# Altium PCB WCH_hairDrierCore_V1.5.PcbDoc (part 4 of 7)
Units mil, origin at the board's own origin, x right, y up, seen from the top; angles counter-clockwise.
Board outline 1683.54 x 992.13 mil, 4 copper layers (Top Layer, Mid-Layer 1, Mid-Layer 2, Bottom Layer); 84 components, 65 nets, 249 pads, 160 vias.
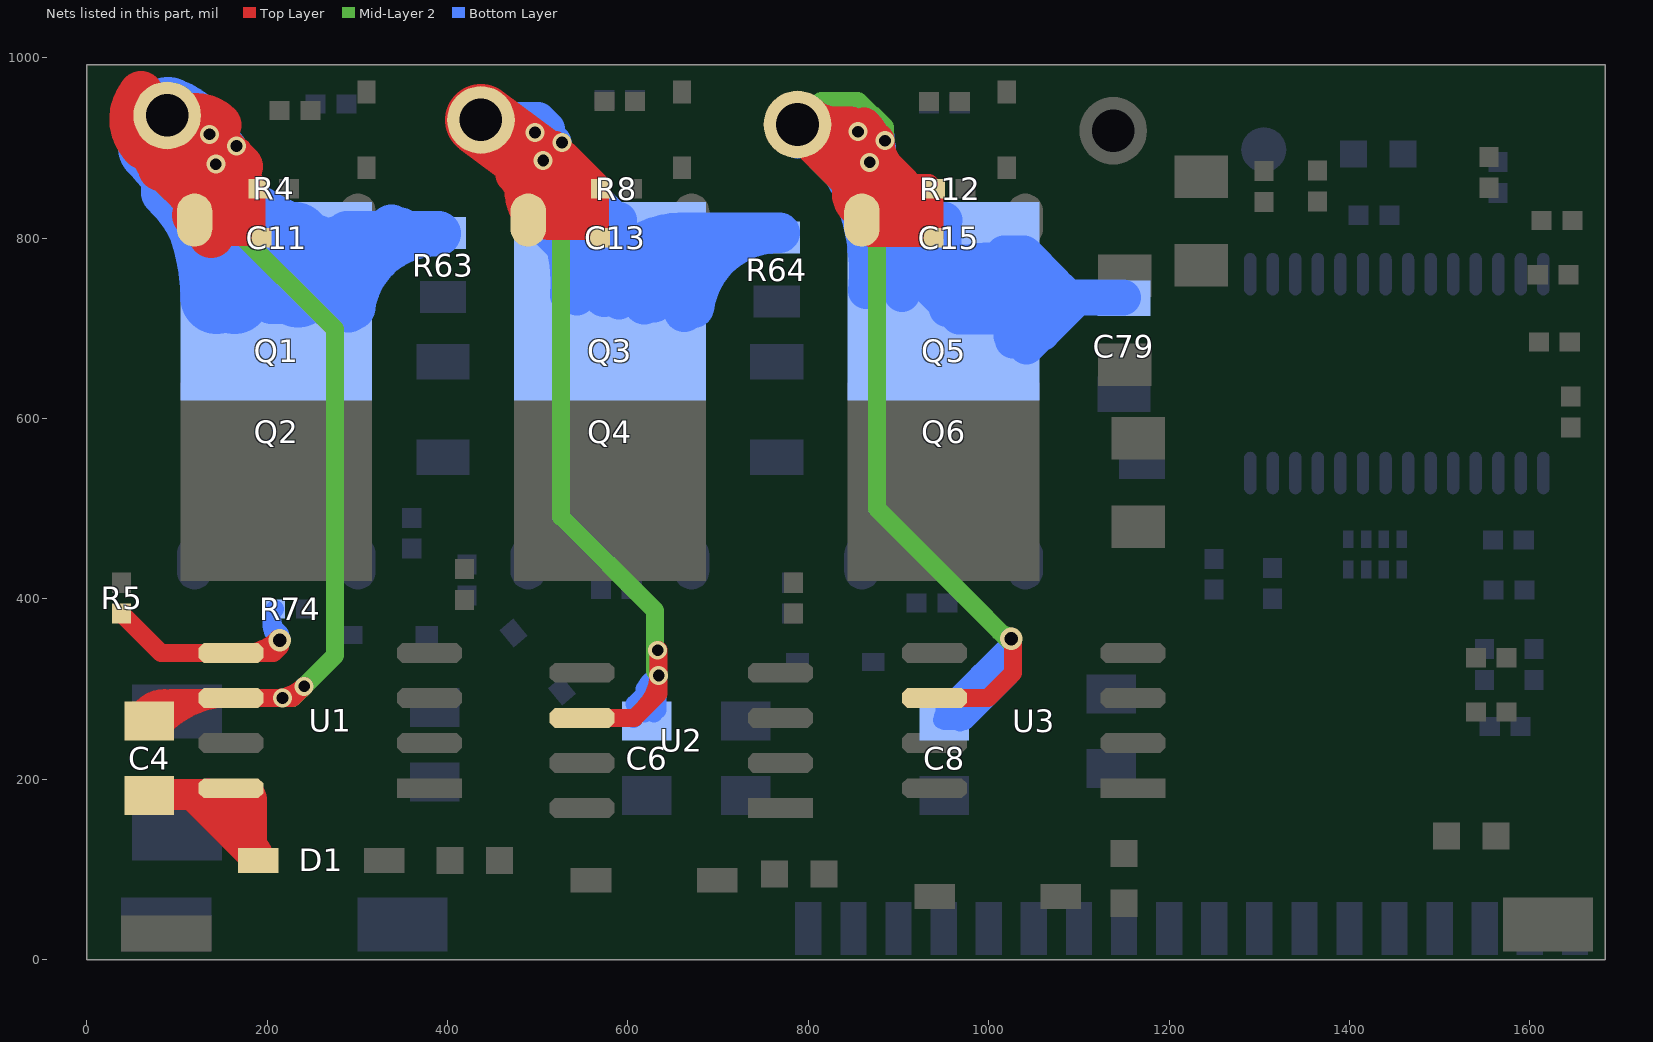
[diagram p6: the nets of this part, all layers, seen from the top]

## Via types
v1: diameter 21, hole 13, Top Layer to Bottom Layer, tented both sides, 155 vias
v2: diameter 25, hole 15, Top Layer to Bottom Layer, tented both sides, 5 vias

## Nets (pads, with @x,y where several pads share a name; then routed paths per layer and width w, separated by ;. In a path a pad name is that pad's centre, name@x,y a point inside that pad or via, vN(x,y) a via of type N, cw(c..) or ccw(c..) an arc to the next point about the centre after c; other vN are vias at no path point) (continued)
M1_CH3_L: R5.2 R74.2 U1.5 | length 590.7
  Top Layer w20: R5.2@38.63,383.78 82.42,340 94,340 U1.5@160,340 ; v2@214,347 207,340 U1.5@160,340 ; v2(214,354) 200,340 U1.5@160,340 ; U1.5@174.17,340 ccw(c174.17,393.83) v2@212.23,355.77 ; U1.5@174.17,340 ccw(c174.17,393.83) v2@212.23,355.77 ; U1.5@174.17,340 ccw(c174.17,393.83) v2@212.23,355.77 ; U1.5@174.17,340 ccw(c174.17,393.83) v2@212.23,355.77 ; U1.5@185,341 ccw(c185,379.63) 212.31,352.31 cw(c185,379.63) U1.5@185,341
  Bottom Layer w20: 204.78,370.22 cw(c188.57,354) v2@211.5,354 ; R74.2@205,381.76 ccw(c241.76,381.76) v2@215.77,355.77 ; R74.2@208.78,388.63 205,384.85 205,370 ; v2(214,354) 214,361 205,370 ; v2@214.8,356.37 cw(c219.38,370) 205,370
M1_U: C8.2 C15.2 C79.2 pad.1@788,926 Q5.3 Q6.2 R12.1 U3.6 | length 12239.5
  Top Layer w20: Q5.3@854,815 868.63,800.37 C15.2@938.78,800.37 940.14,801.72 R12.1@940.14,854.63 ; Q5.3@859.45,820 868.45,811 885.37,811 ; Q5.3@870,824.63 884,824.63 ; 903,861 933.76,861 R12.1@940.14,854.63 ; 909,827.49 909,850 ; 911,825.49 R12.1@940.14,854.63 ; 926.47,824.63 cw(c926.47,808.56) 937.83,819.92 ; 938.78,820.37 894.74,820.37 ; U3.6@940,290 999,290 1027,318 1027,327 1027,354 v2(1025,356) ; 940.14,824.63 899,824.63 ; Q5.3@853.2,828.21 cw(c866.67,810.51) 882.4,826.23 ; Q5.3@853.2,828.21 cw(c866.67,810.51) 882.4,826.23 ; Q5.3@853.2,828.21 cw(c866.67,810.51) 882.4,826.23 ; Q5.3@866.3,803.31 cw(c884.86,784.74) 884.86,811 ; Q5.3@866.3,803.31 cw(c884.86,784.74) 884.86,811 ; Q5.3@866.3,803.31 cw(c884.86,784.74) 884.86,811 ; Q5.3@866.3,813.15 cw(c894.01,785.44) 894.01,824.63 ; Q5.3@866.3,813.15 cw(c894.01,785.44) 894.01,824.63 ; Q5.3@866.3,813.15 cw(c894.01,785.44) 894.01,824.63 ; Q5.3@866.3,817.01 ccw(c906.46,857.17) 906.46,800.37 cw(c906.46,857.17) Q5.3@866.3,817.01 ; Q5.3@866.3,817.01 ccw(c880.8,831.51) 880.8,811 ; Q5.3@866.3,817.01 ccw(c880.8,831.51) 880.8,811 ; Q5.3@866.3,817.01 ccw(c880.8,831.51) 880.8,811 ; Q5.3@867.88,815.23 cw(c884,806.11) 884,824.63 ; Q5.3@867.88,815.23 cw(c884,806.11) 884,824.63 ; Q5.3@867.88,815.23 cw(c884,806.11) 884,824.63 ; Q5.3@867.88,815.23 cw(c884,806.11) 884,824.63 ; Q5.3@867.88,815.23 cw(c884,806.11) 884,824.63 ; Q5.3@867.88,815.23 cw(c884,806.11) 884,824.63 ; 884,824.63 858.63,850 844,850 884,850 ; 884,824.63 888,828.63 888,846 884,850 ; 884,824.63 899,824.63 ; 884,850 909,850 ; 884,850 899,835 899,824.63 ; 885.37,811 894.74,820.37 ; 885.37,811 899,824.63 ; 894.74,820.37 cw(c894.74,764.74) 937.79,799.97 ccw(c894.74,764.74) 894.74,820.37 ; 909,850 935.51,850 R12.1@940.14,854.63 ; 922.73,861 cw(c922.73,837.73) 939.18,854.18 ccw(c922.73,837.73) 922.73,861 ; 926.93,850 ccw(c926.93,867.33) 939.18,855.08 cw(c926.93,867.33) 926.93,850
  Top Layer w40: pad.1@788,926 847,926 v1(855,918) ; pad.1@805.5,926 ccw(c862.23,926) 822.12,885.88 ; pad.1@808,900 846,862 846,850 ; 821,908 874,908 ; 846,861.55 ccw(c891.16,861.55) Q5.3@859.23,829.62 ; 852.31,868 ccw(c852.31,899.69) v1@874.72,877.28 ; Q5.3@859.32,829.55 cw(c868.35,850) 846,850 ; 867.76,850 846,850 ; 869,868 873,864 ; 873,901.96 873,850 ; 873,907 873,891 903,861 ; pad.1@800.37,938.37 ccw(c873.7,1011.7) 873.7,908 cw(c873.7,1011.7) pad.1@800.37,938.37 ; pad.1@800.37,938.37 ccw(c830.25,968.25) 830.25,926 ; pad.1@800.37,938.37 ccw(c830.25,968.25) 830.25,926 ; 830.25,926 ccw(c830.25,883.75) 800.37,913.63 cw(c830.25,883.75) 830.25,926 ; 832.99,908 cw(c832.99,848.99) v1@874.72,890.72 ; 832.99,908 cw(c832.99,848.99) v1@874.72,890.72 ; 832.99,908 cw(c832.99,848.99) v1@874.72,890.72 ; Q5.3@859.57,829.55 ccw(c850.72,850) 873,850 ; Q5.3@859.57,829.55 ccw(c850.72,850) 873,850 ; Q5.3@859.57,829.55 ccw(c850.72,850) 873,850 ; Q5.3@859.67,829.62 ccw(c827.49,861.8) 873,861.8 ; Q5.3@859.67,829.62 ccw(c827.49,861.8) 873,861.8 ; Q5.3@859.67,829.62 ccw(c827.49,861.8) 873,861.8 ; v1@861.72,924.72 cw(c834.48,897.48) 873,897.48 ; v1@861.72,924.72 cw(c834.48,897.48) 873,897.48 ; v1@861.72,924.72 cw(c834.48,897.48) 873,897.48 ; v1@861.72,924.72 cw(c834.48,897.48) 873,897.48 ; v1@861.72,924.72 cw(c834.48,897.48) 873,897.48 ; v1@861.72,924.72 cw(c834.48,897.48) 873,897.48 ; v1@861.72,924.72 cw(c834.48,897.48) 873,897.48 ; v1@861.72,924.72 cw(c834.48,897.48) 873,897.48 ; v1@861.72,924.72 cw(c834.48,897.48) 873,897.48 ; v1@861.72,924.72 cw(c834.48,897.48) 873,897.48 ; 846.76,861.24 cw(c815.36,829.84) 859.76,829.84 ccw(c815.36,829.84) 846.76,861.24 ; v1@875.5,908.29 ccw(c919.92,906.92) 888.5,875.5 cw(c919.92,906.92) v1@875.5,908.29
  Mid-Layer 2 w20: pad.1@790.47,918.92 cw(c801.44,887.5) 824.97,911.03 ; pad.1@793.73,921.16 cw(c827.88,892.26) 827.88,937 ; pad.1@795.31,924.34 cw(c829.95,916.48) 829.95,952 ; pad.1@799,937 871,937 ; pad.1@803,922 885,922 v1(885,908) ; pad.1@807.45,906.55 cw(c844.73,869.27) 844.73,922 ; pad.1@807.92,937 cw(c807.92,870.92) v1@854.65,917.65 ; 809,885 876,818 876,802 ; pad.1@809,908.24 cw(c871,855.79) 871,937 ; pad.1@814.82,919.92 cw(c855,910.8) 855,952 ; 827.83,937 cw(c827.83,965.83) 807.45,945.45 ccw(c864.05,1002.05) v1@864.05,922 ; 844.14,922 cw(c844.14,907.14) v1@854.65,917.65 ; 845,856 868,856 ; v1@849.99,922 cw(c849.99,872.99) v1@884.65,907.65 ; 851,859.96 cw(c875.76,859.96) v1@868.15,883.52 ; v1@855.35,918.35 ccw(c880.35,943.35) v1@880.35,908 ; 855.95,838.05 cw(c902.89,885) 836.5,885 836.5,899.5 ; v1@863,889 863,908 ; 863,897.28 ccw(c881.28,897.28) v1@868.35,884.35 ; 863,897.48 ccw(c834.48,897.48) v1@854.65,917.65 ; 865.86,922 ccw(c865.86,907.14) v1@855.35,917.65 ; v1@867.65,883.65 cw(c847.48,863.48) 876,863.48 ; 868,826 868,844 868,856 ; v1(868,884) 868,856 ; v1@868.01,884.5 cw(c868.51,902) 851,902 851,867 885,901 v1(885,908) ; 873.54,934.46 cw(c847.08,908) 884.5,908 cw(c866.39,908) 879.2,895.2 ; v1@876,885.07 cw(c907.93,885.07) v1@885.35,907.65 ; v1@876,889.64 cw(c897.99,889.64) v1@885.29,907.59 ; 876,892 876,802 ; v2@1023,353 973,403 876,500 876,802 ; v2(1025,356) v2@1027,354 ; 836.5,899.5 810,926 pad.1@788,926 814,952 855,952 ; 836.5,899.5 845,908 863,908 ; 855,952 870,937 871,937 ; v1@855.35,917.65 ccw(c865.86,907.14) 851,907.14 cw(c865.86,907.14) v1@855.35,917.65 ; 863,908 v1(885,908) ; 871,937 885,923 v1(885,908) ; pad.1@795.5,926 ccw(c861.89,926) 814.95,879.05 cw(c861.89,926) pad.1@795.5,926 ; pad.1@815.5,926 ccw(c930.18,926) 849.09,844.91 cw(c930.18,926) pad.1@815.5,926 ; 1012.2,363.8 ccw(c1025,376.61) 1025,358.5 cw(c1025,376.61) 1012.2,363.8
  Bottom Layer w20: C8.2@948.38,265.47 cw(c976.26,261.88) 976.26,290 ; C8.2@950.75,264.4 950.75,278.75 1025,353 v2(1025,356) 1025,322 1023,320 ; C8.2@968.21,262.92 cw(c999,258.96) 999,290 ; 979.91,292.41 ccw(c1007.91,264.4) C8.2@968.31,264.4 ; 990.87,318.87 ccw(c1045.33,264.4) C8.2@968.31,264.4 ; 1005.14,296.14 cw(c956.65,344.62) C8.2@956.65,276.06 ; 1023,330 1007,314 ; v2@1023,354 1023,320 ; C8.2@956.65,276.06 ccw(c956.65,306) 977.82,284.82 cw(c956.65,306) C8.2@956.65,276.06 ; C8.2@968.31,264.4 cw(c994.64,264.4) 976.02,283.02 ccw(c994.64,264.4) C8.2@968.31,264.4 ; 977.5,290 952.25,264.75 973.75,264.75 1007,298 ; 977.5,290 999,290 ; 977.5,290 983,290 1007,314 ; 977.5,290 1001.5,314 1007,314 ; 999,290 1007,298 ; 1007,298 1023,314 ; 1007,314 1023,314 ; 1023,314 1023,320
  Bottom Layer w40: 863,846 863,900 ; v1@863,884.59 cw(c900.67,884.59) 875.41,912.54 ; 868,864 828,904 pad.1@817.5,904 ; v1@877,882 950,809 Q6.2@950,730 868,812 868,850 ; 877,894 877,900 v1@851,926 ; Q6.2@930.56,753.83 cw(c998.24,657.98) 1081.2,740.95 ; Q6.2@953.63,721.15 cw(c1026.03,618.63) 1075.67,733.9 ; Q6.2@966.85,713.15 1070,713.15 ; Q6.2@1017,783 1039.15,783 1072.07,750.07 1072.07,734.22 ; Q6.2@1024.88,776.6 ccw(c1097.99,818.49) 1097.99,734.22 ; Q6.2@1025.33,691.6 cw(c1097.99,650.98) 1097.99,734.22 ; Q6.2@1031.19,762.95 ccw(c1072.07,777.68) 1072.07,734.22 ; Q6.2@1031.52,705.38 cw(c1072.07,691.3) 1072.07,734.22 ; Q6.2@1042,680 1070,708 1070,713.15 ; 1057,695 1058.78,695 1098,734.22 ; C79.2@1148.93,734.22 1098,734.22 ; pad.1@788,908.5 cw(c788,848.14) 830.68,890.82 ccw(c788,848.14) pad.1@788,908.5 ; pad.1@788,908.5 cw(c788,822.8) 848.6,883.4 ccw(c788,822.8) pad.1@788,908.5 ; pad.1@788,926 v1@851,926 ; pad.1@788,926 v1@851,926 ; pad.1@788,926 810,904 pad.1@817.5,904 ; pad.1@800.37,913.63 cw(c830.25,883.75) 830.25,926 ; pad.1@800.37,913.63 cw(c830.25,883.75) 830.25,926 ; pad.1@800.37,913.63 cw(c830.25,883.75) 830.25,926 ; pad.1@800.37,913.63 cw(c830.25,883.75) 830.25,926 ; pad.1@800.37,938.37 ccw(c830.25,968.25) 830.25,926 ; pad.1@800.37,938.37 ccw(c830.25,968.25) 830.25,926 ; pad.1@800.37,938.37 ccw(c830.25,968.25) 830.25,926 ; pad.1@800.37,938.37 ccw(c830.25,968.25) 830.25,926 ; pad.1@817.5,904 868,853.5 868,850 ; pad.1@817.5,904 868,904 ; 842.65,904 cw(c842.65,858.65) v1@874.72,890.72 ; 842.65,904 cw(c842.65,858.65) v1@874.72,890.72 ; 842.65,904 cw(c842.65,858.65) v1@874.72,890.72 ; 844.14,904 ccw(c844.14,928.86) v1@861.72,911.28 ; 844.14,904 ccw(c844.14,928.86) v1@861.72,911.28 ; 844.14,904 ccw(c844.14,928.86) v1@861.72,911.28 ; 844.14,904 ccw(c844.14,928.86) v1@861.72,911.28 ; 844.14,904 ccw(c844.14,928.86) v1@861.72,911.28 ; 844.14,904 ccw(c844.14,928.86) v1@861.72,911.28 ; 844.14,904 ccw(c844.14,928.86) v1@861.72,911.28 ; v1@848.28,911.28 ccw(c865.86,928.86) 865.86,904 ; v1@848.28,911.28 ccw(c865.86,928.86) 865.86,904 ; v1@848.28,911.28 ccw(c865.86,928.86) 865.86,904 ; v1@861.72,924.72 cw(c824.82,887.82) 877,887.82 ccw(c824.82,887.82) v1@861.72,924.72 ; v1@861.72,924.72 cw(c846.55,909.55) 868,909.55 ; v1@861.72,924.72 cw(c846.55,909.55) 868,909.55 ; v1@861.72,924.72 cw(c846.55,909.55) 868,909.55 ; v1@861.72,924.72 cw(c846.55,909.55) 868,909.55 ; v1@861.72,924.72 cw(c846.55,909.55) 868,909.55 ; v1@861.72,924.72 cw(c846.55,909.55) 868,909.55 ; 867.21,854.29 ccw(c950,937.09) Q6.2@950,820 ; 867.21,854.29 ccw(c950,937.09) Q6.2@950,820 ; 867.21,854.29 ccw(c950,937.09) Q6.2@950,820 ; 867.21,854.29 ccw(c950,937.09) Q6.2@950,820 ; 868,850 868,904 ; 868,863.52 ccw(c951.53,863.52) Q6.2@950.55,780 ; 868,863.52 ccw(c951.53,863.52) Q6.2@950.55,780 ; 868,863.52 ccw(c951.53,863.52) Q6.2@950.55,780 ; 868,903.99 ccw(c952.01,903.99) Q6.2@951.02,819.99 ; 868,904 cw(c868,987.25) 801.89,936.64 ccw(c868,987.25) 868,904 ; 868,903.99 ccw(c952.01,903.99) Q6.2@951.02,819.99 ; 868,903.99 ccw(c952.01,903.99) Q6.2@951.02,819.99 ; Q6.2@1026.71,686.76 cw(c1070,664.45) 1070,713.15 ; Q6.2@1026.71,686.76 cw(c1070,664.45) 1070,713.15 ; Q6.2@1026.71,686.76 cw(c1070,664.45) 1070,713.15 ; Q6.2@1034.8,742.32 ccw(c1070,748.97) 1070,713.15 ; Q6.2@1034.8,742.32 ccw(c1070,748.97) 1070,713.15 ; Q6.2@1034.8,742.32 ccw(c1070,748.97) 1070,713.15 ; 1072.07,734.22 1098,734.22 ; pad.1@798.61,922.89 cw(c638.25,762.53) 864.07,741.65 ccw(c638.25,762.53) pad.1@798.61,922.89 ; pad.1@820.5,911.5 ccw(c841.22,932.22) 861.61,911.18 cw(c841.22,932.22) pad.1@820.5,911.5 ; 832.75,888.75 ccw(c867.17,923.17) 868.2,874.5 cw(c867.17,923.17) 832.75,888.75 ; 849.1,872.4 cw(c780.39,803.68) 870.22,766.61 ccw(c780.39,803.68) 849.1,872.4 ; 850.08,881.92 ccw(c868,899.85) 868,874.5 cw(c868,899.85) 850.08,881.92 ; 858.87,862.63 cw(c748.58,752.33) 903.9,737.96 ccw(c748.58,752.33) 858.87,862.63 ; v1@861.42,925 cw(c828.93,889.58) 877,889.58 ccw(c828.93,889.58) v1@861.42,925 ; 866.54,910.46 cw(c840.08,884) 877.5,884 ccw(c840.08,884) 866.54,910.46 ; v1@875.5,908 ccw(c934.65,908) 892.82,866.18 cw(c934.65,908) v1@875.5,908 ; 881.86,877.14 cw(c799.92,795.19) 907.16,751.25 ccw(c799.92,795.19) 881.86,877.14
M1_V: C6.2 C13.2 pad.1@437,931 Q3.3 Q4.2 R8.1 R64.2 U2.6 | length 9341.9
  Top Layer w20: 473.22,869.78 cw(c433.29,829.84) Q3.3@489.76,829.84 ; 477,866 499.45,843.55 Q3.3@499.45,820 ; 487,875 487.55,875 527,835.55 ; 492.49,850.51 cw(c474.39,832.42) Q3.3@499.62,828.1 ; Q3.3@493.4,838.2 cw(c508.64,817.13) 527.03,835.52 ; Q3.3@496.3,817.01 ccw(c518.04,838.75) 518.04,808 ; Q3.3@496.3,822.99 cw(c526.61,792.68) 526.61,835.55 ; Q3.3@497.53,815.49 ccw(c511.45,824.67) 511.45,808 553.51,808 cw(c553.51,791.29) C13.2@567.74,800.04 ; 498.12,864.43 cw(c468.89,835.2) 509.61,828.06 ; Q3.3@499.45,835.55 527,835.55 ; v1@500,889 ccw(c500,918.08) v1@526.54,906.2 ; v1@518,909 521,909 544,886 ; 520.63,886 552,854.63 ; 528.37,854.63 552,854.63 ; 538.46,868.17 ccw(c569.63,899.34) R8.1@569.63,855.26 ; 548.34,808 cw(c548.34,780.43) C13.2@567.83,799.92 ; U2.6@549,268 607,268 634,295 v1@634,343 ; 552,831.72 cw(c574.87,831.72) R8.1@569.77,854.02 ; 552,840 552,854.63 ; 556.45,835.55 527,835.55 ; 564.5,865.5 cw(c553.62,854.63) R8.1@569,854.63 ; C13.2@567.81,799.95 ccw(c521,758.43) 521,821 568.78,821 ; C13.2@568.78,800.37 568.78,821 ; R8.1@568.78,853.28 568.78,821 ; R8.1@569.15,855.04 cw(c527,890.87) 527,835.55 ; R8.1@570.14,859.87 544,886 ; v1@497,886 ccw(c497,917.7) v1@526.53,906.18 ; v1@497,886 ccw(c497,917.7) v1@526.53,906.18 ; v1@497,886 544,886 ; 527,835.55 ccw(c527,812.89) 507.7,824.77 cw(c527,812.89) 527,835.55 ; 619,280 ccw(c584.01,315) v1@633.5,315 ; 619,280 ccw(c584.01,315) v1@633.5,315 ; 619,280 ccw(c584.01,315) v1@633.5,315 ; v1@506,885.5 cw(c506,848.97) 531.83,874.8 ccw(c506,848.97) v1@506,885.5 ; v1@506.09,885.51 cw(c510.51,861.25) 527.94,878.69 ccw(c510.51,861.25) v1@506.09,885.51 ; Q3.3@506.3,813.15 cw(c534.01,785.44) 534.01,824.63 ccw(c534.01,785.44) Q3.3@506.3,813.15 ; Q3.3@506.3,817.01 ccw(c528.04,838.75) 528.04,808 cw(c528.04,838.75) Q3.3@506.3,817.01 ; Q3.3@506.3,822.99 cw(c536.61,792.68) 536.61,835.55 ccw(c536.61,792.68) Q3.3@506.3,822.99
  Top Layer w40: 473.22,869.78 cw(c433.29,829.84) Q3.3@489.76,829.84 ; Q3.3@489.17,829.69 cw(c530.33,852.67) 497,886 477,866 Q3.3@499.45,843.55 ; 490.29,852.71 cw(c467.43,829.84) Q3.3@499.76,829.84
  Top Layer w80: pad.1@437,931 v1@497,886
  Mid-Layer 2 w20: pad.1@437,931 486.45,863.21 ; pad.1@439.79,924.04 cw(c455.03,885.93) 484.05,914.95 ; pad.1@440.38,903.71 cw(c447.59,845.59) 489,887 ; pad.1@441.08,924.71 cw(c457.22,899.81) 478.21,920.79 ; pad.1@451.96,907.93 cw(c470.97,878.6) 495.69,903.31 ; pad.1@456.45,911.55 cw(c473.97,894.03) 473.97,918.81 ; pad.1@462,914 485,891 v1@497,891 ; pad.1@462.73,940.7 ccw(c497,953.62) v1(497,917) ; pad.1@464.4,933.32 ccw(c480.19,934.65) 480.19,918.81 ; pad.1@464.5,931 ccw(c511.58,931) 478.29,897.71 ; 482,876 cw(c504.97,853.03) v1@505.98,885.5 ; 489,883 v1@497,891 ; v1@489.59,924.41 cw(c451.18,886) v1@505.5,886 ; 490,909 480.19,918.81 ; 492.72,891 cw(c492.72,872.72) 505.65,885.65 cw(c456.51,836.51) 526,836.51 ; v1@497,908.93 ccw(c528.93,908.93) v1@506.35,886.35 ; v1@497.35,917.35 ccw(c524.76,944.76) v1@524.76,906 ; v1(506,886) 506,835.12 509.5,831.62 ; 506.5,907.5 ccw(c517.21,918.21) v1@526.69,906.39 ; v1@630,320 630,351 630,387 526,491 526,809 ; 476.13,877.36 cw(c529.76,916.49) 464.17,926.75 ccw(c529.76,916.49) 476.13,877.36 ; 476.13,877.36 ccw(c422.49,838.24) 432.75,903.83 cw(c422.49,838.24) 476.13,877.36 ; 480.19,918.81 459.19,918.81 461,917 v1(497,917) ; 486.45,863.21 486.45,866.45 v1@526,906 ; 486.45,863.21 526,809 ; v1@497,891 v1(497,917) ; v1(497,917) 508,906 v1@526,906 ; 526,809 v1@526,906 ; 630,325.86 ccw(c644.86,325.86) v1@634.35,315.35 ; 630,325.86 ccw(c644.86,325.86) v1@634.35,315.35 ; 630,325.86 ccw(c644.86,325.86) v1@634.35,315.35
  Bottom Layer w20: Q4.2@590,730 Q4.2@590,826.88 ; C6.2@606,267 608,269 630,291 ; 618.25,293.08 cw(c640.66,293.08) v1@634.15,314.52 ; 618.25,298.57 ccw(c654.91,298.57) C6.2@628.99,272.64 ; C6.2@620.62,274.37 ccw(c610.57,291) 630,291 ; C6.2@628.12,273.42 cw(c645.15,294.25) 618.25,294.25 ; 630,300.61 cw(c590.44,300.61) 618.41,272.64 ccw(c583.2,307.86) v1@633,307.86 ; v1@630,311.5 618.25,299.75 618.25,294.25 ; C6.2@633,276.65 v1(633,343) 630,340 630,291 ; 618.25,294.25 607.5,283.5 622.5,283.5 630,291 ; 630,304.14 cw(c644.86,304.14) v1@634.35,314.65 ; 630,304.14 cw(c644.86,304.14) v1@634.35,314.65 ; 630,304.14 cw(c644.86,304.14) v1@634.35,314.65 ; 630,325.86 ccw(c644.86,325.86) v1@634.35,315.35 ; 630,325.86 ccw(c644.86,325.86) v1@634.35,315.35 ; 630,325.86 ccw(c644.86,325.86) v1@634.35,315.35 ; C6.2@612.51,272.64 ccw(c598.64,286.5) 618.25,286.5 cw(c598.64,286.5) C6.2@612.51,272.64
  Bottom Layer w30: Q4.2@515.44,798.26 ccw(c487.54,826.16) Q4.2@527,826.16 ; 517.25,868.75 cw(c459.32,810.83) Q4.2@528.35,766.71 ; Q4.2@527,793 527,859 ; 527,878 527,859 ; 543.64,842.36 cw(c491.52,790.25) Q4.2@553.63,750.56 ; 545.26,840.74 527,859 ; Q4.2@547.56,838.44 ccw(c580,870.87) Q4.2@580,825 ; v1@507.35,890.29 cw(c498.95,863.53) 527,863.53 ; v1@507.35,890.29 cw(c498.95,863.53) 527,863.53 ; v1@507.35,890.29 cw(c498.95,863.53) 527,863.53 ; v1@508.8,889.52 cw(c478.8,851.8) 527,851.8 ; v1@508.8,889.52 cw(c478.8,851.8) 527,851.8 ; v1@508.8,889.52 cw(c478.8,851.8) 527,851.8 ; v1@493.82,913.82 ccw(c507.86,927.86) 507.86,908 cw(c507.86,927.86) v1@493.82,913.82 ; 523.62,862.38 cw(c465.89,804.64) 536.78,764.12 ccw(c465.89,804.64) 523.62,862.38 ; 540.49,845.51 ccw(c590,895.01) 590,825 cw(c590,895.01) 540.49,845.51 ; Q4.2@551.4,834.6 cw(c501.23,784.44) 562.83,749.23 ccw(c501.23,784.44) Q4.2@551.4,834.6
  Bottom Layer w40: 461.37,898.37 ccw(c491.25,928.25) 491.25,886 ; 473.15,894.85 cw(c326.03,747.73) Q4.2@533.77,736.25 ; 481.95,886.05 cw(c332.83,736.92) Q4.2@543.7,734.28 ; 508.15,923 500.15,931 pad.1@437,931 ; v1@517.5,906 ccw(c562.16,906) 530.58,874.42 ; 518.3,849.7 ccw(c590,921.4) Q4.2@590,820 ; 519.62,885.38 cw(c441.45,807.21) Q4.2@539.1,755.4 ; 525.37,842.63 ccw(c580,897.25) Q4.2@580,820 ; 526.5,878.5 cw(c448.63,800.64) Q4.2@548.16,753.51 ; 527,878 589,816 Q4.2@590,816 ; Q4.2@536.44,831.56 cw(c445.98,741.1) Q4.2@573.71,734.05 ; 557.88,847.12 cw(c491.44,780.69) Q4.2@574.44,736.65 ; Q4.2@566.64,838.36 cw(c503.12,774.84) Q4.2@584.31,736.4 ; pad.1@437,931 590,778 590,730 506,814 v1(506,886) ; pad.1@437,931 471,908 506,908 ; pad.1@437,931 v1(506,886) ; 466.87,901.13 cw(c496.75,931) 454.5,931 ccw(c496.75,931) 466.87,901.13 ; 466.87,901.13 ccw(c437,871.25) 437,913.5 cw(c437,871.25) 466.87,901.13 ; 472.39,907.92 cw(c495.47,943.31) 454.12,934.61 ccw(c495.47,943.31) 472.39,907.92 ; 472.39,907.92 ccw(c449.31,872.53) 440.61,913.88 cw(c449.31,872.53) 472.39,907.92 ; 475.82,908 cw(c475.82,855.82) v1@512.72,892.72 ; 475.82,908 cw(c475.82,855.82) v1@512.72,892.72 ; 475.82,908 cw(c475.82,855.82) v1@512.72,892.72 ; 479.25,931 cw(c479.25,973.25) 449.37,943.37 ccw(c479.25,973.25) 479.25,931 ; 479.25,931 ccw(c479.25,888.75) 449.37,918.63 cw(c479.25,888.75) 479.25,931 ; v1@497,926.5 cw(c497,908.04) 510.05,921.09 ccw(c497,908.04) v1@497,926.5 ; v1@497,926.5 ccw(c497,908.39) 484.2,921.2 cw(c497,908.39) v1@497,926.5 ; v1(506,886) 506,908 ; 506,908 cw(c506,969.52) 452.28,939.53 ccw(c506,969.52) 506,908 ; pad.1@463.97,912.76 ccw(c486.76,946.46) 500.12,908.03 cw(c486.76,946.46) pad.1@463.97,912.76 ; pad.1@464.04,913.37 ccw(c487.91,949.98) 499.52,907.84 cw(c487.91,949.98) pad.1@464.04,913.37 ; 471.36,907.76 ccw(c485.96,929.35) 503.33,909.92 cw(c485.96,929.35) 471.36,907.76 ; 481.25,886.75 ccw(c506,911.51) 506,876.5 cw(c506,911.51) 481.25,886.75 ; 486.14,931 cw(c486.14,906.14) 503.72,923.72 ccw(c486.14,906.14) 486.14,931 ; v1@496.5,886 ccw(c531.51,886) 506.75,861.25 cw(c531.51,886) v1@496.5,886
  Bottom Layer w45: Q4.2@573.9,734.84 cw(c659.6,718.82) Q4.2@659.6,806 ; Q4.2@618.14,726.57 cw(c713.8,708.68) 713.8,806 ; Q4.2@628.47,728.64 cw(c716.68,717.02) 716.68,806 ; Q4.2@658.43,806 R64.2@768,806 ; Q4.2@662.37,718.3 cw(c767.99,698.55) R64.2@767.99,806 ; Q4.2@673.08,722.76 cw(c768,710.27) R64.2@768,806
  other v1: 634,315 527,906
M1_W: C4.2 C11.2 pad.1@89,936 Q1.3 Q2.2 R4.1 R63.2 U1.6 | length 25174.1
  Top Layer w20: pad.1@63,936 pad.1@89,936 ; C4.2@69.01,270.05 cw(c114.45,228.29) 114.45,290 ; C4.2@73,269.5 93.5,290 ; C4.2@83.74,256.52 cw(c160,186.42) U1.6@160,290 ; C4.2@86.57,266.78 cw(c111.53,271.97) 93.5,290 ; Q1.3@126.3,817.01 ccw(c164.94,855.65) 164.94,801 ; Q1.3@133.1,839.8 cw(c139.29,810.88) 160.21,831.79 ; Q1.3@134.27,838.76 cw(c146.19,818.24) 162.98,835.02 ; Q1.3@135.86,801 168,801 ; Q1.3@136.14,838.94 ccw(c120.13,883) 167,883 ; Q1.3@137.29,820.24 cw(c148.47,768.07) C11.2@186.2,805.8 ; 138,860 167,831 ; 142.97,820.15 ccw(c130.5,854.45) 167,854.45 ; v1@143,881.5 cw(c143,819.94) R4.1@186.53,863.47 ; 143.06,820.86 cw(c155.25,790.54) 178.35,813.65 ; 143.76,854.24 cw(c125.8,836.27) 148.78,825.45 ; 148.35,813.97 ccw(c168,822.37) 168,801 ; 149.81,801.35 ccw(c140.88,825.9) 167,825.9 ; v1@166.5,902 ccw(c211.16,902) 179.58,870.42 ; 167,825 191,801 168,801 ; 180,821.39 180,872 ccw(c199.2,872) R4.1@189.93,855.18 ; 180,829.86 cw(c214.4,829.86) R4.1@190.08,854.18 ; C11.2@188,800.39 R4.1@188,851 ; 188,814.64 ccw(c207.55,814.64) C11.2@193.73,800.82 ; v1(241,303) 228,290 U1.6@160,290 ; 93.5,290 U1.6@160,290 ; 167,831 167,808 164,805 168,801 ; 167,831 167,883 ; 167,883 150,900 v1@172,900 ; v1@172,900 ccw(c172,868.52) 143.45,881.79 cw(c172,868.52) v1@172,900 ; C4.2@62.39,280.11 cw(c86.28,256.22) 86.28,290 ccw(c86.28,256.22) C4.2@62.39,280.11 ; C4.2@76.54,265.96 cw(c134.56,207.94) 134.56,290 ccw(c134.56,207.94) C4.2@76.54,265.96 ; v1@208.41,290 ccw(c208.41,335.59) 240.65,303.35 cw(c208.41,335.59) v1@208.41,290 ; v1@217,290.5 ccw(c217,318.26) 236.63,298.63 cw(c217,318.26) v1@217,290.5
  Top Layer w50: 81.7,876.94 cw(c61.48,803.14) 138,803.14 ; 93.31,898.34 ccw(c120.77,929.22) 150,900 ; 97.5,889 ccw(c151.82,889) 113.41,850.59 ; Q1.3@119.45,825.32 cw(c119.45,789.86) 144.52,814.93 ; Q1.3@123.21,826.08 ccw(c87.49,861.8) 138,861.8 ; Q1.3@124.36,827.81 ccw(c97.03,839.14) 124.37,850.45 ; 139.45,820 138,821.45 138,835 138,872 ; 152.52,891.97 cw(c145.98,882.54) 157.27,884.58 ; 85,889 pad.1@89,936 ; 85,889 pad.1@89,936 ; 85,889 v1@139,889 ; 85,889 121,889 ; pad.1@89,923.5 cw(c89,832.97) 153.02,896.98 ; pad.1@89,923.5 cw(c89,832.97) 153.02,896.98 ; pad.1@89,923.5 cw(c89,832.97) 153.02,896.98 ; pad.1@89,923.5 cw(c89,832.97) 153.02,896.98 ; pad.1@89,923.5 cw(c89,832.97) 153.02,896.98 ; pad.1@89,923.5 cw(c89,832.97) 153.02,896.98 ; pad.1@89,923.5 cw(c89,832.97) 153.02,896.98 ; pad.1@89,923.5 cw(c89,832.97) 153.02,896.98 ; pad.1@89,923.5 cw(c89,832.97) 153.02,896.98 ; pad.1@89,923.5 cw(c89,832.97) 153.02,896.98 ; pad.1@89,936 v1@136.5,913.5 ; pad.1@89,936 170.5,879.5 v1@136.5,913.5 ; pad.1@89,936 v1@136.5,913.5 ; pad.1@89,936 v1@139,889 ; pad.1@89,936 121,889 ; pad.1@89,936 77.55,886.45 132,832 pad.1@89,936 ; pad.1@89,936 v1@136.5,913.5 ; pad.1@89,936 150,900 ; pad.1@89,936 121,889 ; pad.1@89,936 138,872 ; pad.1@89,936 114,936 v1@136.5,913.5 ; pad.1@89.74,923.52 cw(c94.3,846.31) 149,901 ; pad.1@89.74,923.52 cw(c94.3,846.31) 149,901 ; pad.1@89.74,923.52 cw(c94.3,846.31) 149,901 ; pad.1@89.74,923.52 cw(c94.3,846.31) 149,901 ; pad.1@89.74,923.52 cw(c94.3,846.31) 149,901 ; pad.1@89.74,923.52 cw(c94.3,846.31) 149,901 ; pad.1@89.74,923.52 cw(c94.3,846.31) 149,901 ; pad.1@89.74,923.52 cw(c94.3,846.31) 149,901 ; pad.1@89.74,923.52 cw(c94.3,846.31) 149,901 ; pad.1@89.74,923.52 cw(c94.3,846.31) 149,901 ; pad.1@89.74,923.52 cw(c94.3,846.31) 149,901 ; pad.1@89.74,923.52 cw(c94.3,846.31) 149,901 ; pad.1@89.74,923.52 cw(c94.3,846.31) 149,901 ; pad.1@89.74,923.52 cw(c94.3,846.31) 149,901 ; pad.1@89.74,923.52 cw(c94.3,846.31) 149,901 ; pad.1@98.59,927.98 ccw(c135.83,896.83) 101.5,862.5 ; pad.1@98.59,927.98 ccw(c135.83,896.83) 101.5,862.5 ; pad.1@98.59,927.98 ccw(c135.83,896.83) 101.5,862.5 ; pad.1@98.59,927.98 ccw(c135.83,896.83) 101.5,862.5 ; pad.1@98.59,927.98 ccw(c135.83,896.83) 101.5,862.5 ; pad.1@101.34,934.02 ccw(c144.16,927.17) 113.5,896.5 ; pad.1@101.34,934.02 ccw(c144.16,927.17) 113.5,896.5 ; pad.1@101.34,934.02 ccw(c144.16,927.17) 113.5,896.5 ; pad.1@101.34,934.02 ccw(c144.16,927.17) 113.5,896.5 ; pad.1@101.34,934.02 ccw(c144.16,927.17) 113.5,896.5 ; pad.1@101.5,936 ccw(c167.89,936) 120.95,889.05 ; pad.1@101.5,936 ccw(c167.89,936) 120.95,889.05 ; pad.1@101.5,936 ccw(c167.89,936) 120.95,889.05 ; pad.1@101.5,936 ccw(c167.89,936) 120.95,889.05 ; pad.1@101.5,936 ccw(c167.89,936) 120.95,889.05 ; 108.24,889 ccw(c108.24,942.76) 146.25,904.75 ; 108.24,889 ccw(c108.24,942.76) 146.25,904.75 ; 108.24,889 ccw(c108.24,942.76) 146.25,904.75 ; 108.24,889 ccw(c108.24,942.76) 146.25,904.75 ; 108.24,889 ccw(c108.24,942.76) 146.25,904.75 ; 108.24,889 ccw(c108.24,942.76) 146.25,904.75 ; 119.74,890.26 cw(c59.32,829.84) 144.76,829.84 ; 119.74,890.26 cw(c59.32,829.84) 144.76,829.84 ; 119.74,890.26 cw(c59.32,829.84) 144.76,829.84 ; 119.74,890.26 cw(c59.32,829.84) 144.76,829.84 ; 121,889 138,872 ; v1@136.5,913.5 150,900 ; v1@139,889 150,900 ; 60.24,960.06 ccw(c93.74,932.03) 62.85,901.15 cw(c93.74,932.03) 60.24,960.06 ; pad.1@120.31,936 cw(c120.31,899.31) 146.25,925.25 ccw(c120.31,899.31) pad.1@120.31,936
  Mid-Layer 2 w20: pad.1@61.74,932.39 85,861.5 ; pad.1@62.83,927.54 92,882 ; pad.1@65.45,921.8 126,848 ; pad.1@77.81,910.88 136,900 ; pad.1@84.9,908.81 v1(136,915) ; pad.1@85,932 85,861.5 ; pad.1@86.7,908.6 151,917 ; pad.1@102.45,959.99 151,917 ; pad.1@104.98,923.76 ccw(c130.43,957) v1@135.93,915.5 ; pad.1@106.52,957.2 v1(136,915) ; pad.1@110.34,953.35 136,900 ; 111.27,904.62 ccw(c115.6,927.81) v1@135.58,915.27 ; 112.5,889 ccw(c178.89,889) 131.95,842.05 ccw(c85,795.11) 85,861.5 ; pad.1@115.62,942.9 126,848 ; pad.1@115.72,929.49 85,861.5 ; pad.1@115.83,941.02 ccw(c146.22,944.35) 136.16,915.47 cw(c143.91,937.56) pad.1@122.81,927.42 ; pad.1@115.94,930.49 92,882 ; 116.5,908.5 cw(c131.9,893.1) v1@135.91,914.51 ; pad.1@122,942.68 cw(c95.31,912.53) v1@135.5,914.97 ; pad.1@122.14,925.85 cw(c115.47,904.1) v1@135.56,914.77 ; 123,915 v1@132,924 ; pad.1@123.5,944.5 cw(c94.53,915.52) v1@135.5,915.01 ; 132,925.86 ccw(c146.86,925.86) v1@136.35,915.35 ; v1@136.17,914.53 cw(c143.82,893.61) 158.58,910.29 ; v1@136.25,914.57 cw(c146.7,896.37) 152.85,916.43 ; v1@139.5,885.5 139.5,834.5 ; 151.5,896.5 151.5,822.5 ; pad.1@62.11,930.24 85,889 ; pad.1@62.11,930.24 85,889 ; pad.1@62.11,930.24 85,889 ; pad.1@62.11,930.24 85,889 ; pad.1@68.54,917.63 cw(c19.15,873.26) 85.44,869.7 ; pad.1@68.54,917.63 cw(c19.15,873.26) 85.44,869.7 ; pad.1@68.54,917.63 cw(c19.15,873.26) 85.44,869.7 ; pad.1@69.55,916.55 cw(c32.27,879.27) 85,879.27 ; pad.1@69.55,916.55 cw(c32.27,879.27) 85,879.27 ; pad.1@69.55,916.55 cw(c32.27,879.27) 85,879.27 ; pad.1@69.55,916.55 cw(c32.27,879.27) 85,879.27 ; pad.1@73.47,913.3 cw(c58.39,891.27) 85,889 ; pad.1@73.47,913.3 cw(c58.39,891.27) 85,889 ; pad.1@73.47,913.3 cw(c58.39,891.27) 85,889 ; pad.1@73.47,913.3 cw(c58.39,891.27) 85,889 ; pad.1@73.47,913.3 cw(c58.39,891.27) 85,889 ; pad.1@73.47,913.3 cw(c58.39,891.27) 85,889 ; pad.1@73.47,913.3 cw(c58.39,891.27) 85,889 ; pad.1@73.47,913.3 cw(c58.39,891.27) 85,889 ; pad.1@73.47,913.3 cw(c58.39,891.27) 85,889 ; pad.1@73.47,913.3 cw(c58.39,891.27) 85,889 ; pad.1@73.47,913.3 cw(c58.39,891.27) 85,889 ; pad.1@73.47,913.3 cw(c58.39,891.27) 85,889 ; pad.1@74.06,912.91 cw(c52.63,879.82) 92,882 ; pad.1@74.06,912.91 cw(c52.63,879.82) 92,882 ; pad.1@74.06,912.91 cw(c52.63,879.82) 92,882 ; pad.1@78.61,910.54 cw(c53.53,849.07) 114.73,874.8 ; pad.1@78.61,910.54 cw(c53.53,849.07) 114.73,874.8 ; pad.1@78.61,910.54 cw(c53.53,849.07) 114.73,874.8 ; pad.1@84.3,930.15 cw(c14.8,843.58) 125.16,855.65 ; pad.1@84.3,930.15 cw(c14.8,843.58) 125.16,855.65 ; pad.1@84.3,930.15 cw(c14.8,843.58) 125.16,855.65 ; pad.1@84.34,947.6 cw(c99.99,908.65) 129.67,938.33 ; pad.1@84.34,947.6 cw(c99.99,908.65) 129.67,938.33 ; pad.1@84.34,947.6 cw(c99.99,908.65) 129.67,938.33 ; pad.1@84.34,947.6 cw(c99.99,908.65) 129.67,938.33 ; 85,861.4 cw(c161.59,861.4) pad.1@108.18,916.29 ; 85,861.4 cw(c161.59,861.4) pad.1@108.18,916.29 ; 85,861.4 cw(c161.59,861.4) pad.1@108.18,916.29 ; 85,861.4 cw(c161.59,861.4) pad.1@108.18,916.29 ; 85,861.5 pad.1@89,936 ; 85,889 cw(c111.61,886.74) pad.1@100.47,911.01 ; 85,889 cw(c111.61,886.74) pad.1@100.47,911.01 ; 85,889 cw(c111.61,886.74) pad.1@100.47,911.01 ; 85,889 cw(c111.61,886.74) pad.1@100.47,911.01 ; 85,889 cw(c111.61,886.74) pad.1@100.47,911.01 ; 85,889 cw(c111.61,886.74) pad.1@100.47,911.01 ; 85,889 cw(c111.61,886.74) pad.1@100.47,911.01 ; 85,889 cw(c111.61,886.74) pad.1@100.47,911.01 ; 85,889 cw(c111.61,886.74) pad.1@100.47,911.01 ; 85,889 cw(c111.61,886.74) pad.1@100.47,911.01 ; 85,889 cw(c111.61,886.74) pad.1@100.47,911.01 ; 85,889 cw(c111.61,886.74) pad.1@100.47,911.01 ; 85,889 pad.1@89,936 ; 85,889 pad.1@114.53,925.78 ; 85,889 pad.1@89,936 ; 85,889 pad.1@114.53,925.78 ; 85,889 pad.1@89,936 ; 85,889 pad.1@114.53,925.78 ; 85,889 pad.1@89,936 ; 85,889 pad.1@114.53,925.78 ; 85,889 92,882 ; 85,889 96,900 136,900 ; 85,889 126,848 ; 85,889 111,915 v1(136,915) ; 85.44,869.7 cw(c151.74,866.15) pad.1@107.37,915.54 ; 85.44,869.7 cw(c151.74,866.15) pad.1@107.37,915.54 ; 85.44,869.7 cw(c151.74,866.15) pad.1@107.37,915.54 ; pad.1@89,936 136,900 ; pad.1@89,936 92,882 ; pad.1@89,936 126,848 ; pad.1@89,936 v1@132,924 ; pad.1@89,936 v1(136,915) ; pad.1@89,936 v1@132,924 ; pad.1@89,936 132,936 ; pad.1@89,936 132,936 ; pad.1@89,936 151,917 ; pad.1@89,936 132,936 ; pad.1@90.51,928.65 cw(c100.35,880.9) v1@140.32,908.82 ; pad.1@90.51,928.65 cw(c100.35,880.9) v1@140.32,908.82 ; pad.1@90.51,928.65 cw(c100.35,880.9) v1@140.32,908.82 ; pad.1@91.42,948.26 cw(c82.12,901.09) 125.45,921.94 ; pad.1@91.42,948.26 cw(c82.12,901.09) 125.45,921.94 ; pad.1@91.42,948.26 cw(c82.12,901.09) 125.45,921.94 ; 91.44,890.13 cw(c114.31,908.89) pad.1@94.12,930.52 ; 91.44,890.13 cw(c114.31,908.89) pad.1@94.12,930.52 ; 91.44,890.13 cw(c114.31,908.89) pad.1@94.12,930.52 ; pad.1@91.8,929.04 cw(c112.26,878.09) 151.08,916.92 ; pad.1@91.8,929.04 cw(c112.26,878.09) 151.08,916.92 ; pad.1@91.8,929.04 cw(c112.26,878.09) 151.08,916.92 ; pad.1@91.8,929.04 cw(c112.26,878.09) 151.08,916.92 ; 92,882 cw(c131.36,884.19) pad.1@106.41,914.71 ; 92,882 cw(c131.36,884.19) pad.1@106.41,914.71 ; 92,882 cw(c131.36,884.19) pad.1@106.41,914.71 ; 92,882 v1(143,882) ; pad.1@92.08,929.16 cw(c107.35,895.26) v1@136.44,918.42 ; pad.1@92.08,929.16 cw(c107.35,895.26) v1@136.44,918.42 ; pad.1@92.08,929.16 cw(c107.35,895.26) v1@136.44,918.42 ; pad.1@92.08,929.16 cw(c107.35,895.26) v1@136.44,918.42 ; pad.1@92.08,929.16 cw(c107.35,895.26) v1@136.44,918.42 ; pad.1@92.08,929.16 cw(c107.35,895.26) v1@136.44,918.42 ; pad.1@92.18,929.21 cw(c113.16,884.32) 146.01,921.42 ; pad.1@92.18,929.21 cw(c113.16,884.32) 146.01,921.42 ; pad.1@92.18,929.21 cw(c113.16,884.32) 146.01,921.42 ; pad.1@94.04,930.44 cw(c115.77,906.47) 138.65,929.35 ; pad.1@94.04,930.44 cw(c115.77,906.47) 138.65,929.35 ; pad.1@94.04,930.44 cw(c115.77,906.47) 138.65,929.35 ; pad.1@94.04,930.44 cw(c115.77,906.47) 138.65,929.35 ; pad.1@94.9,909.14 cw(c105.61,860.33) 136,900 ; pad.1@94.9,909.14 cw(c105.61,860.33) 136,900 ; pad.1@94.9,909.14 cw(c105.61,860.33) 136,900 ; pad.1@94.92,931.4 cw(c115.75,915.23) 131.73,936.21 ; pad.1@94.92,931.4 cw(c115.75,915.23) 131.73,936.21 ; pad.1@94.92,931.4 cw(c115.75,915.23) 131.73,936.21 ; pad.1@94.92,931.4 cw(c115.75,915.23) 131.73,936.21 ; pad.1@94.92,931.4 cw(c115.75,915.23) 131.73,936.21 ; pad.1@94.92,931.4 cw(c115.75,915.23) 131.73,936.21 ; pad.1@94.92,931.4 cw(c115.75,915.23) 131.73,936.21 ; pad.1@94.92,931.4 cw(c115.75,915.23) 131.73,936.21 ; pad.1@94.92,931.4 cw(c115.75,915.23) 131.73,936.21 ; pad.1@96.2,938.1 ccw(c127.97,947.37) v1@131.95,914.51 ; pad.1@96.2,938.1 ccw(c127.97,947.37) v1@131.95,914.51 ; pad.1@96.2,938.1 ccw(c127.97,947.37) v1@131.95,914.51 ; pad.1@96.83,945.75 cw(c57.55,896.83) 119.91,903.65 ; pad.1@96.83,945.75 cw(c57.55,896.83) 119.91,903.65 ; pad.1@96.83,945.75 cw(c57.55,896.83) 119.91,903.65 ; pad.1@97.79,909.94 132,936 ; pad.1@97.79,909.94 132,936 ; pad.1@97.79,909.94 132,936 ; pad.1@97.79,962.06 132,936 ; pad.1@97.79,962.06 132,936 ; pad.1@97.79,962.06 132,936 ; pad.1@102.3,911.93 cw(c132.63,857.06) 151,917 ; pad.1@102.3,911.93 cw(c132.63,857.06) 151,917 ; pad.1@102.3,911.93 cw(c132.63,857.06) 151,917 ; pad.1@103.63,912.72 cw(c121.95,883.57) v1(136,915) ; pad.1@103.63,912.72 cw(c121.95,883.57) v1(136,915) ; pad.1@103.63,912.72 cw(c121.95,883.57) v1(136,915) ; 104.96,873.64 cw(c128.89,893.28) pad.1@107.77,915.9 ; 104.96,873.64 cw(c128.89,893.28) pad.1@107.77,915.9 ; 104.96,873.64 cw(c128.89,893.28) pad.1@107.77,915.9 ; pad.1@107.47,915.63 cw(c129.89,890.9) 153.5,914.5 ; pad.1@107.47,915.63 cw(c129.89,890.9) 153.5,914.5 ; pad.1@107.47,915.63 cw(c129.89,890.9) 153.5,914.5 ; pad.1@107.47,915.63 cw(c129.89,890.9) 153.5,914.5 ; pad.1@109.33,917.48 cw(c125.95,902.34) v1@132,924 ; pad.1@109.33,917.48 cw(c125.95,902.34) v1@132,924 ; pad.1@109.33,917.48 cw(c125.95,902.34) v1@132,924 ; pad.1@109.33,917.48 cw(c125.95,902.34) v1@132,924 ; pad.1@109.33,917.48 cw(c125.95,902.34) v1@132,924 ; pad.1@109.33,917.48 cw(c125.95,902.34) v1@132,924 ; pad.1@113.5,948.48 ccw(c169.37,976.95) 151,917 ; pad.1@113.5,948.48 ccw(c169.37,976.95) 151,917 ; pad.1@113.5,948.48 ccw(c169.37,976.95) 151,917 ; pad.1@113.96,924.47 cw(c132,916.13) 132,936 ; pad.1@113.96,924.47 cw(c132,916.13) 132,936 ; pad.1@113.96,924.47 cw(c132,916.13) 132,936 ; pad.1@113.96,924.47 cw(c132,916.13) 132,936 ; pad.1@113.96,924.47 cw(c132,916.13) 132,936 ; pad.1@113.96,924.47 cw(c132,916.13) 132,936 ; pad.1@113.96,924.47 cw(c132,916.13) 132,936 ; pad.1@113.96,924.47 cw(c132,916.13) 132,936 ; pad.1@113.96,924.47 cw(c132,916.13) 132,936 ; pad.1@113.96,924.47 cw(c132,916.13) 132,936 ; pad.1@113.96,947.53 ccw(c132,955.87) 132,936 ; pad.1@113.96,947.53 ccw(c132,955.87) 132,936 ; pad.1@113.96,947.53 ccw(c132,955.87) 132,936 ; pad.1@113.96,947.53 ccw(c132,955.87) 132,936 ; pad.1@113.96,947.53 ccw(c132,955.87) 132,936 ; pad.1@113.96,947.53 ccw(c132,955.87) 132,936 ; pad.1@113.96,947.53 ccw(c132,955.87) 132,936 ; pad.1@113.96,947.53 ccw(c132,955.87) 132,936 ; pad.1@113.96,947.53 ccw(c132,955.87) 132,936 ; pad.1@113.96,947.53 ccw(c132,955.87) 132,936 ; pad.1@114.46,925.61 ccw(c175.93,900.53) 114.73,874.8 ; pad.1@114.46,925.61 ccw(c175.93,900.53) 114.73,874.8 ; pad.1@114.46,925.61 ccw(c175.93,900.53) 114.73,874.8 ; pad.1@115.98,941.31 ccw(c138.04,945.66) v1@132,924 ; pad.1@115.98,941.31 ccw(c138.04,945.66) v1@132,924 ; pad.1@115.98,941.31 ccw(c138.04,945.66) v1@132,924 ; pad.1@115.98,941.31 ccw(c138.04,945.66) v1@132,924 ; pad.1@115.98,941.31 ccw(c138.04,945.66) v1@132,924 ; pad.1@115.98,941.31 ccw(c138.04,945.66) v1@132,924 ; pad.1@116.11,940.63 ccw(c150.04,946.43) v1(136,915) ; pad.1@116.11,940.63 ccw(c150.04,946.43) v1(136,915) ; pad.1@116.11,940.63 ccw(c150.04,946.43) v1(136,915) ; pad.1@116.47,937.3 ccw(c166.38,939.67) 136,900 ; pad.1@116.47,937.3 ccw(c166.38,939.67) 136,900 ; pad.1@116.47,937.3 ccw(c166.38,939.67) 136,900 ; 126,848 139.5,834.5 ; 126,848 126,865 v1(143,882) ; v1@132,924 90.13,908.52 v1@132,924 ; v1@132,924 104.19,958.92 v1@132,924 ; v1@132,924 132,936 ; 132,936 151,917 ; v1@135.56,914.75 ccw(c111.93,901.43) 119.22,927.57 cw(c111.93,901.43) v1@135.56,914.75 ; 136,900 ccw(c160.85,900) v1@143.35,882.36 ; 136,900 ccw(c160.85,900) v1@143.35,882.36 ; 136,900 ccw(c160.85,900) v1@143.35,882.36 ; 136,900 ccw(c160.85,900) v1@143.35,882.36 ; 136,900 136,889 v1(143,882) ; 136,900 v1(136,915) ; v1(136,915) 149,902 v1(166,902) ; v1(136,915) 137,915 139,917 151,917 ; v1@136.14,914.52 cw(c142.72,891.72) v1@159.5,908.5 ; v1@136.14,914.52 cw(c142.72,891.72) v1@159.5,908.5 ; v1@136.14,914.52 cw(c142.72,891.72) v1@159.5,908.5 ; v1@136.37,915.33 ccw(c166,941.58) v1(166,902) ; v1@136.37,915.33 ccw(c166,941.58) v1(166,902) ; 139.5,834.5 151.5,822.5 ; v1(143,882) 146,882 v1(166,902) ; v1@143.35,882.35 cw(c161.11,900.11) 136,900.11 ccw(c161.11,900.11) v1@143.35,882.35 ; 151,917 v1(166,902) ; 151.5,822.5 161,813 ; 161,813 161,897 v1(166,902) ; 161,813 275,699 275,340 275,337 228,290 v1(217,290) ; v1(217,290) ccw(c217,317.58) 240.57,303.26 cw(c217,317.58) v1(217,290) ; pad.1@98.34,900 cw(c98.34,837.34) 142.65,881.65 ccw(c98.34,837.34) pad.1@98.34,900 ; pad.1@98.58,900 ccw(c98.58,952.42) 135.65,915.35 cw(c98.58,952.42) pad.1@98.58,900 ; pad.1@105.89,905.63 cw(c95.38,849.38) 142.59,881.72 ccw(c95.38,849.38) pad.1@105.89,905.63 ; pad.1@109.2,915.57 cw(c121.26,882.97) 135.79,914.55 ccw(c121.26,882.97) pad.1@109.2,915.57 ; 128.91,905.43 cw(c107.35,877.28) 142.5,881.93 ccw(c107.35,877.28) 128.91,905.43 ; v1@136,914.5 cw(c136,872.25) 165.87,902.13 ccw(c136,872.25) v1@136,914.5 ; 144.5,906.5 ccw(c158.12,920.12) 165.8,902.46 cw(c158.12,920.12) 144.5,906.5 ; v1@217,290.5 ccw(c217,318.26) 236.63,298.63 cw(c217,318.26) v1@217,290.5
  Bottom Layer w50: Q2.2@128.91,739.53 ccw(c-6.98,749.3) 89.36,845.64 ccw(c172.14,928.43) Q2.2@194.48,813.51 ; Q2.2@134,826 Q2.2@109,826 ; Q2.2@230,744 230,730 205,730 Q2.2@109,826 ; Q2.2@240.88,728.58 cw(c331.02,713.63) 331.02,805 ; Q2.2@256.03,800.71 ccw(c290.72,851.2) 337.93,812.17 ; Q2.2@261.05,729.79 cw(c346.31,719.07) 346.31,805 ; Q2.2@261.14,730.59 cw(c347.76,721.96) 347.76,809 ; Q2.2@270,730 332,805 ; Q2.2@277.61,799.6 ccw(c308.14,841.86) 345,805 ; Q2.2@288.43,805 332,805 ; Q2.2@290.2,720.4 cw(c389.99,703.85) 389.99,805 332,805 ; Q2.2@295,723 cw(c387.33,711.39) R63.2@387.33,804.44 ; 85,850 pad.1@89,936 85,889 85,850 ; 85,850 Q2.2@109,826 ; 85,896.17 cw(c128.83,896.17) pad.1@97.84,927.16 ; 85,896.17 cw(c128.83,896.17) pad.1@97.84,927.16 ; 85,896.17 cw(c128.83,896.17) pad.1@97.84,927.16 ; 85,896.17 cw(c128.83,896.17) pad.1@97.84,927.16 ; 85,896.17 cw(c128.83,896.17) pad.1@97.84,927.16 ; 85,896.17 cw(c128.83,896.17) pad.1@97.84,927.16 ; 85,896.17 cw(c128.83,896.17) pad.1@97.84,927.16 ; 85,896.17 cw(c128.83,896.17) pad.1@97.84,927.16 ; 85,896.17 cw(c128.83,896.17) pad.1@97.84,927.16 ; 85,896.17 cw(c128.83,896.17) pad.1@97.84,927.16 ; Q2.2@123.36,811.64 cw(c60.54,748.83) Q2.2@149.02,740.93 ; Q2.2@123.35,811.65 ccw(c161.08,849.37) Q2.2@188.38,803.54 ; Q2.2@123.36,811.64 cw(c60.54,748.83) Q2.2@149.02,740.93 ; Q2.2@123.35,811.65 ccw(c161.08,849.37) Q2.2@188.38,803.54 ; Q2.2@123.35,811.65 ccw(c161.08,849.37) Q2.2@188.38,803.54 ; Q2.2@123.36,811.64 cw(c60.54,748.83) Q2.2@149.02,740.93 ; Q2.2@123.35,811.65 ccw(c161.08,849.37) Q2.2@188.38,803.54 ; Q2.2@123.36,811.64 cw(c60.54,748.83) Q2.2@149.02,740.93 ; 99.36,835.65 ccw(c171.92,908.21) 204.33,810.84 cw(c171.92,908.21) 99.36,835.65 ; Q2.2@111.51,823.49 cw(c21.72,733.7) 148.7,733.7 ccw(c21.72,733.7) Q2.2@111.51,823.49
  Bottom Layer w80: 74.69,900.31 cw(c-91.92,733.7) Q2.2@143.7,733.7 ; 85.11,891.5 cw(c82.44,833) Q2.2@141,833 ; 86.19,891.2 cw(c36.65,799.36) Q2.2@141,799.36 ; pad.1@94.13,924.45 ccw(c313.23,1021.83) Q2.2@232.36,796.12 ; pad.1@99.42,921.98 cw(c-93.72,778.37) Q2.2@144.41,743.35 ; Q2.2@150.25,824.75 ccw(c210,884.5) Q2.2@210,800 ; Q2.2@219.08,799.38 cw(c231.47,889) v1@141,889 ; pad.1@86.5,936 ccw(c201.18,936) 120.09,854.91 ; pad.1@86.5,936 ccw(c201.18,936) 120.09,854.91 ; pad.1@86.5,936 ccw(c201.18,936) 120.09,854.91 ; pad.1@86.5,936 ccw(c201.18,936) 120.09,854.91 ; pad.1@86.5,936 ccw(c201.18,936) 120.09,854.91 ; pad.1@86.53,935.61 ccw(c141,944.13) v1@141,889 ; pad.1@86.53,935.61 ccw(c141,944.13) v1@141,889 ; pad.1@86.53,935.61 ccw(c141,944.13) v1@141,889 ; pad.1@86.53,935.61 ccw(c141,944.13) v1@141,889 ; pad.1@86.53,935.61 ccw(c141,944.13) v1@141,889 ; pad.1@89,936 89,886 234,741 pad.1@89,936 ; pad.1@89,936 141,819 v1@141,889 ; pad.1@89,936 v1@141,889 ; pad.1@89,936 85,889 v1@141,889 ; pad.1@89,936 v1@141,889 ; pad.1@89.84,938.36 cw(c64.13,865.91) 141,865.91 ; pad.1@89.84,938.36 cw(c64.13,865.91) 141,865.91 ; pad.1@89.84,938.36 cw(c64.13,865.91) 141,865.91 ; pad.1@89.84,938.36 cw(c64.13,865.91) 141,865.91 ; pad.1@89.84,938.36 cw(c64.13,865.91) 141,865.91 ; pad.1@90.77,937.77 cw(c-30.5,816.5) Q2.2@141,816.5 ; pad.1@90.77,937.77 cw(c-30.5,816.5) Q2.2@141,816.5 ; pad.1@90.77,937.77 cw(c-30.5,816.5) Q2.2@141,816.5 ; pad.1@90.77,937.77 cw(c-30.5,816.5) Q2.2@141,816.5 ; pad.1@90.77,937.77 cw(c-30.5,816.5) Q2.2@141,816.5 ; 108.83,866.17 cw(c-23.64,733.7) 163.7,733.7 ccw(c-23.64,733.7) 108.83,866.17 ; Q2.2@136.11,838.89 ccw(c230,932.78) 230,800 cw(c230,932.78) Q2.2@136.11,838.89
NetC4_1: C4.1 D1.2 U1.8 | length 1202.1
  Top Layer w20: C4.1@83.4,173.48 cw(c123.27,133.61) 123.27,190 ; C4.1@83.4,189.96 ccw(c117.11,223.68) 117.11,176 ; C4.1@86.74,180.4 cw(c97.5,179.17) 97.5,190 U1.8@160,190 ; C4.1@95,176 123,176 160,139 ; 114,176 160,130 ; U1.8@125,190 160,155 ; D1.2@180,110 160,130 ; D1.2@190,110 190,128 174,144 174,176 U1.8@160,190 ; 190,126 190,175 175,190 U1.8@160,190 ; 98.79,176 ccw(c98.79,226.21) U1.8@134.29,190.71 ; 98.79,176 ccw(c98.79,226.21) U1.8@134.29,190.71 ; 98.79,176 ccw(c98.79,226.21) U1.8@134.29,190.71 ; 160,130 160,155 ; 160,155 ccw(c209.15,155) D1.2@183.27,113.21 ; 160,155 ccw(c209.15,155) D1.2@183.27,113.21 ; 160,155 ccw(c209.15,155) D1.2@183.27,113.21 ; 160,155 160,167 U1.8@160,190 ; 174,161.03 cw(c213.97,161.03) U1.8@185.71,189.29 ; 174,161.03 cw(c213.97,161.03) U1.8@185.71,189.29 ; 174,161.03 cw(c213.97,161.03) U1.8@185.71,189.29 ; 174,172.2 cw(c192.21,172.2) U1.8@185.38,189.07 ; 174,172.2 cw(c192.21,172.2) U1.8@185.38,189.07 ; 174,172.2 cw(c192.21,172.2) U1.8@185.38,189.07 ; U1.8@184.29,189.29 cw(c170.51,175.51) 190,175.51 ; U1.8@184.29,189.29 cw(c170.51,175.51) 190,175.51 ; U1.8@184.29,189.29 cw(c170.51,175.51) 190,175.51 ; U1.8@184.29,189.29 cw(c170.51,175.51) 190,175.51 ; U1.8@184.29,189.29 cw(c170.51,175.51) 190,175.51 ; U1.8@184.29,189.29 cw(c170.51,175.51) 190,175.51 ; 190.63,127.37 cw(c173.97,110.7) D1.2@197.43,108.45 ; 190.63,127.37 cw(c173.97,110.7) D1.2@197.43,108.45 ; 190.63,127.37 cw(c173.97,110.7) D1.2@197.43,108.45